# Altium PCB СТЖ-1-ПП-02-00-001-1.PcbDoc
Units mm, origin at the board's own origin, x right, y up, seen from the top; angles counter-clockwise.
Board outline 70 x 80 mm, 2 copper layers (Top Layer, Bottom Layer), stack 2.036 mm thick; 33 components, 37 nets, 153 pads, 63 vias.
Unrouted connection lines stored in the file: 10.
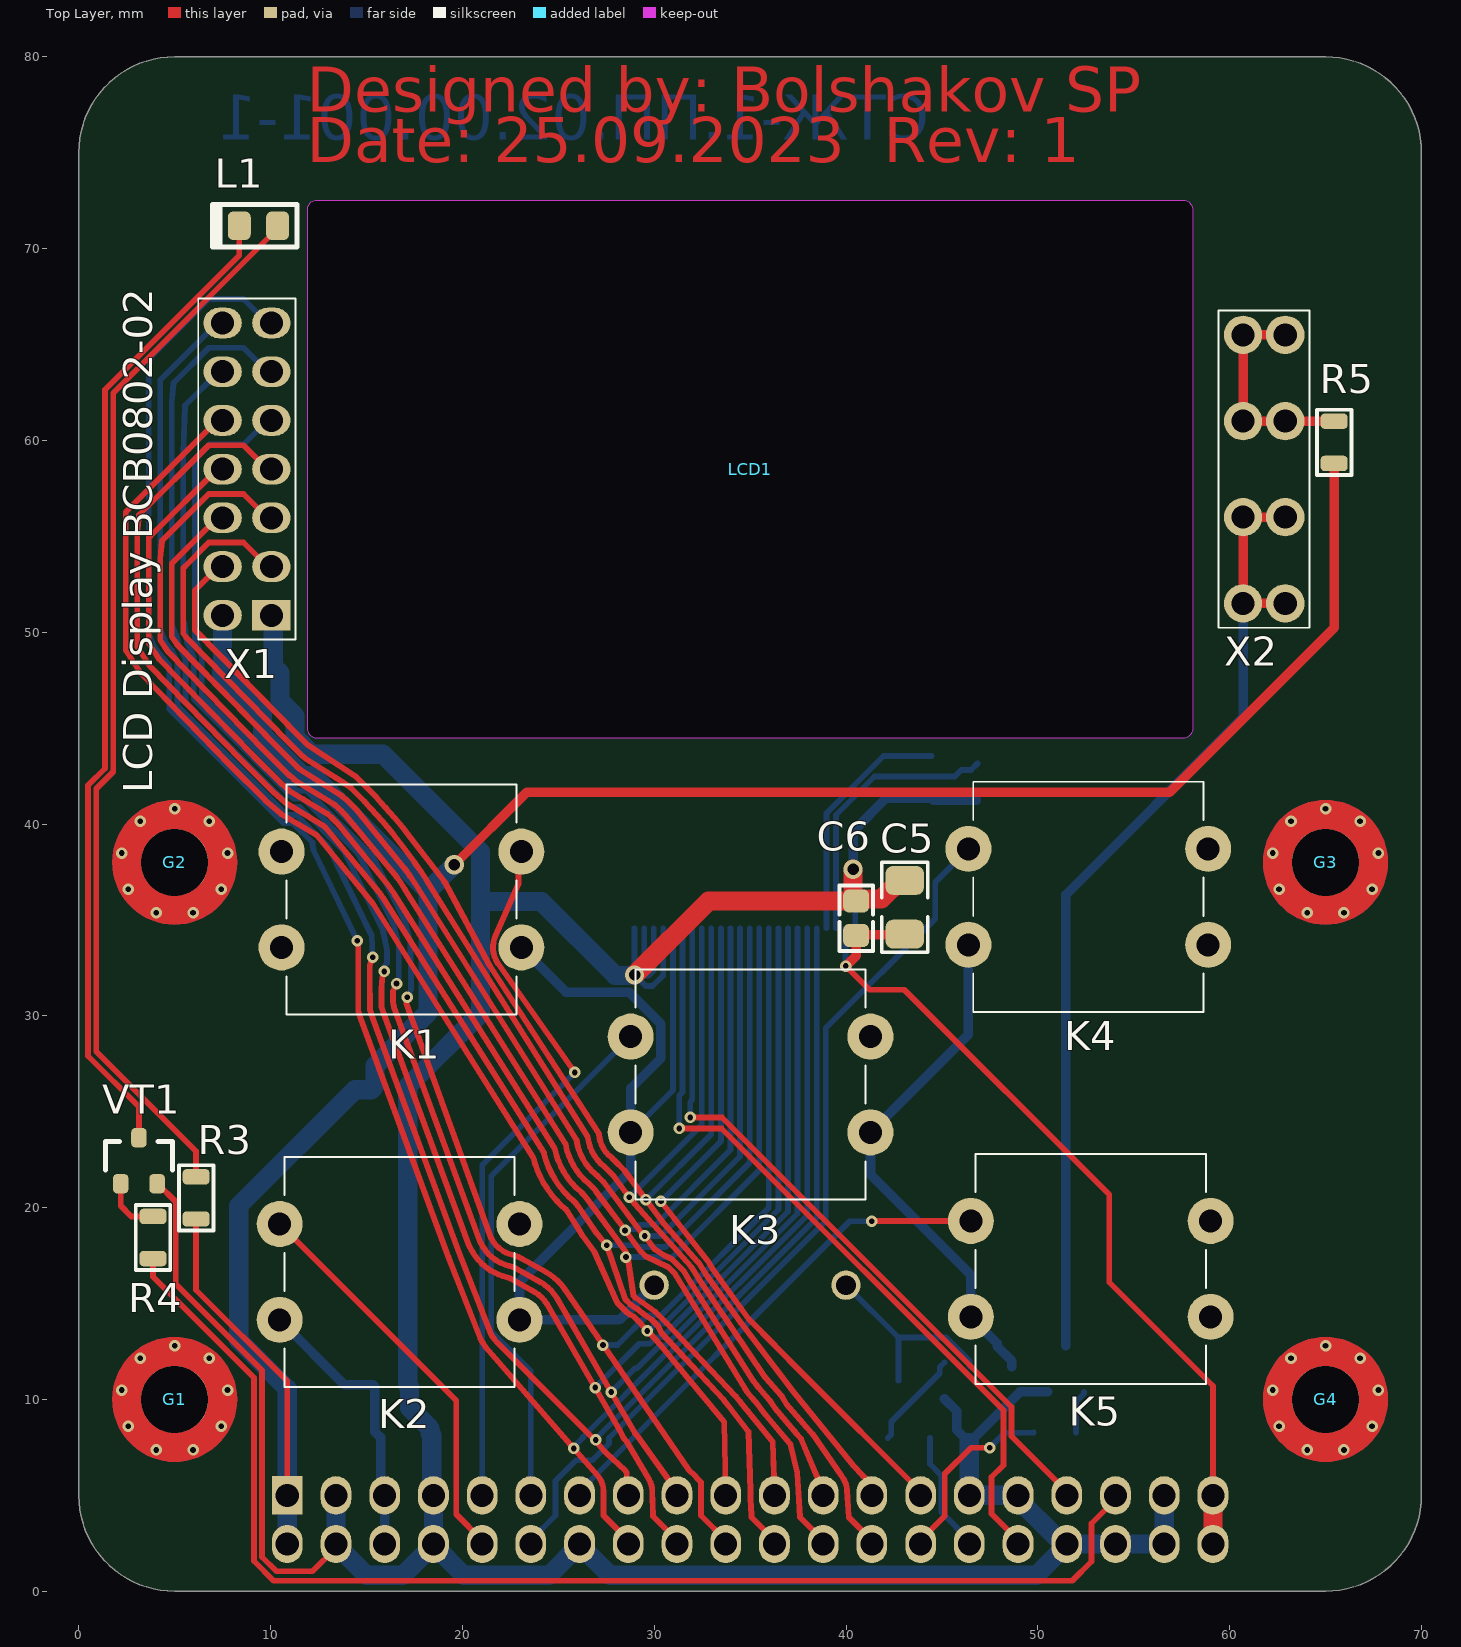
[diagram p0: Top Layer view]
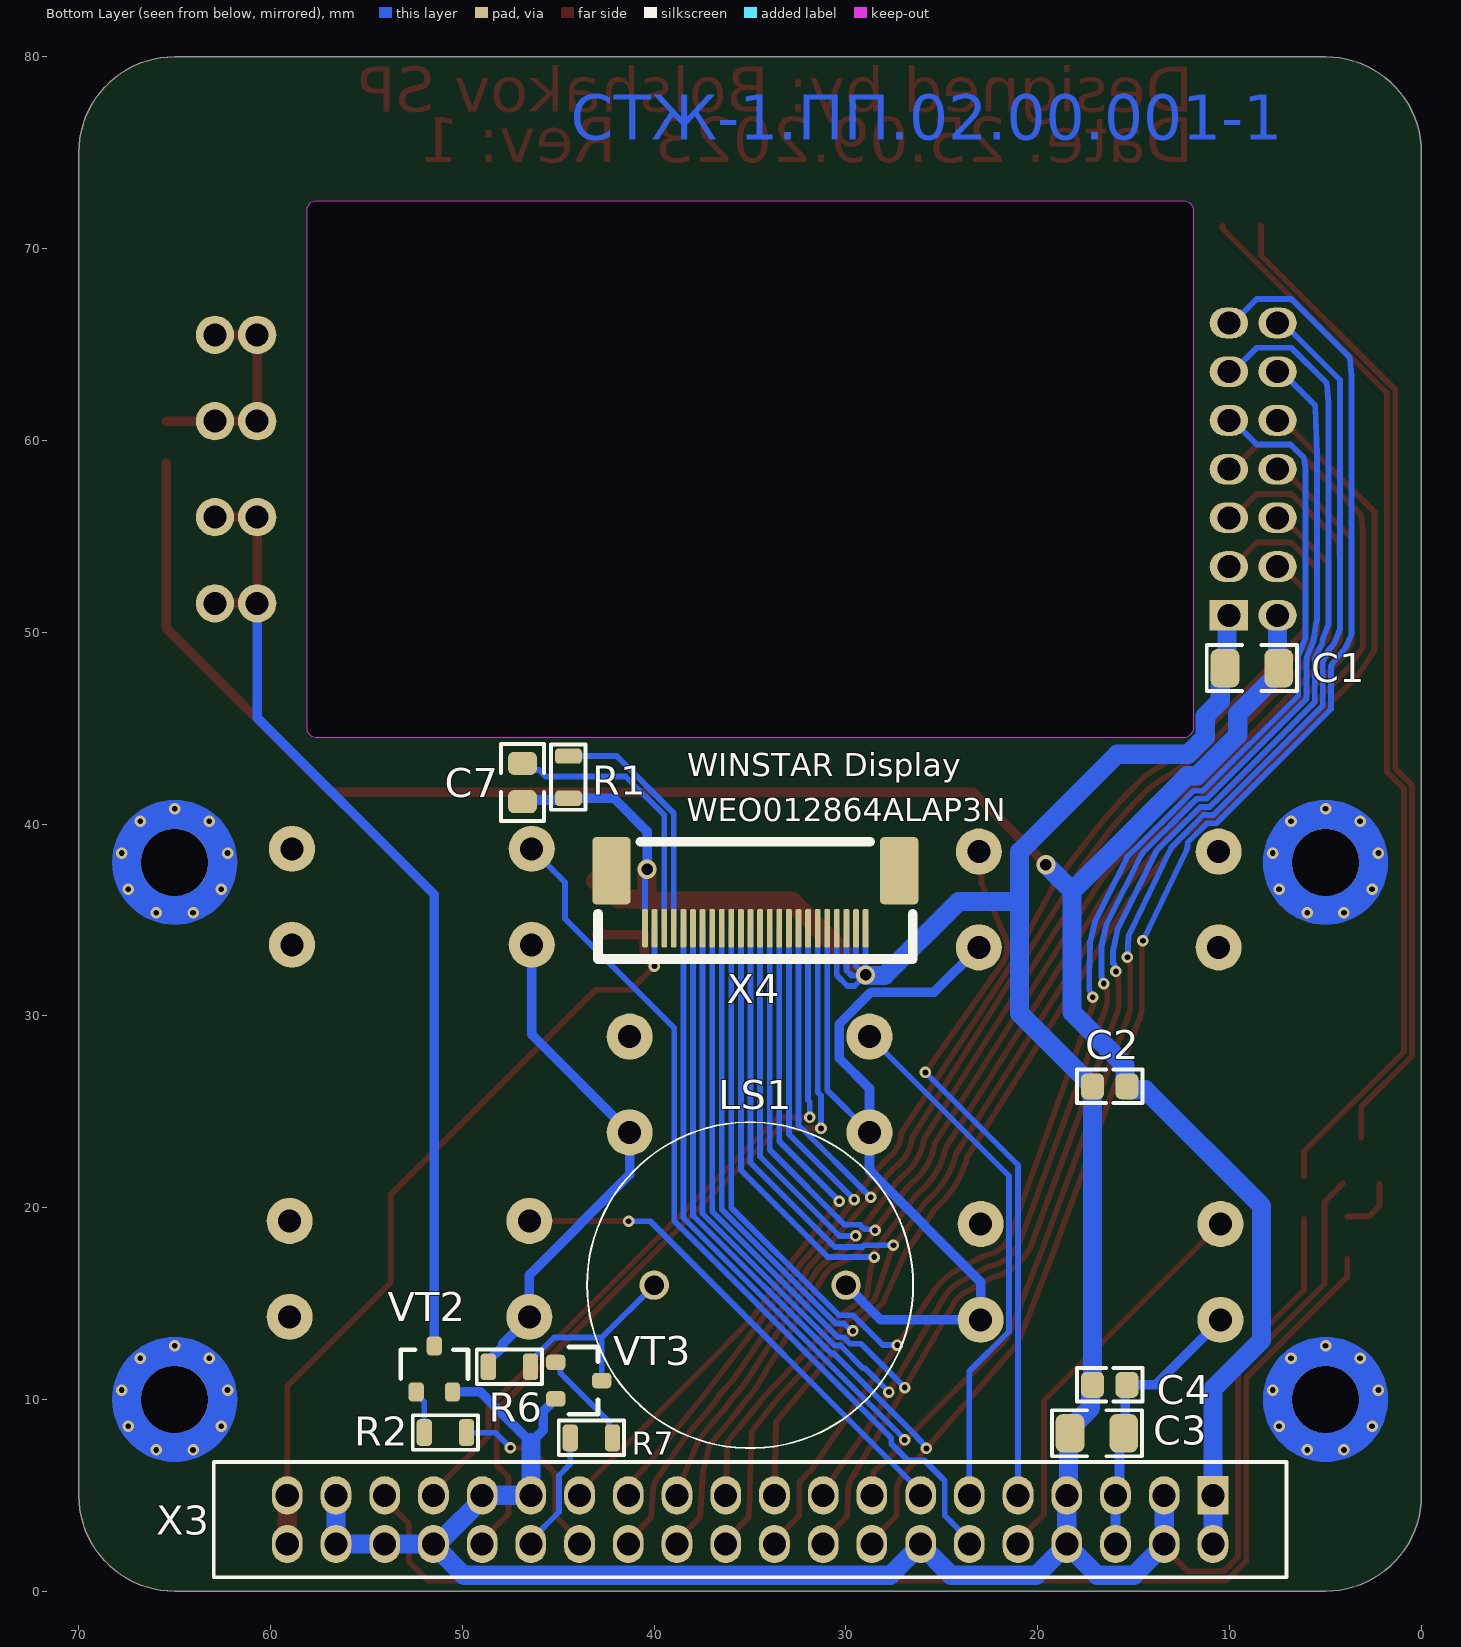
[diagram p1: Bottom Layer view, seen from below]
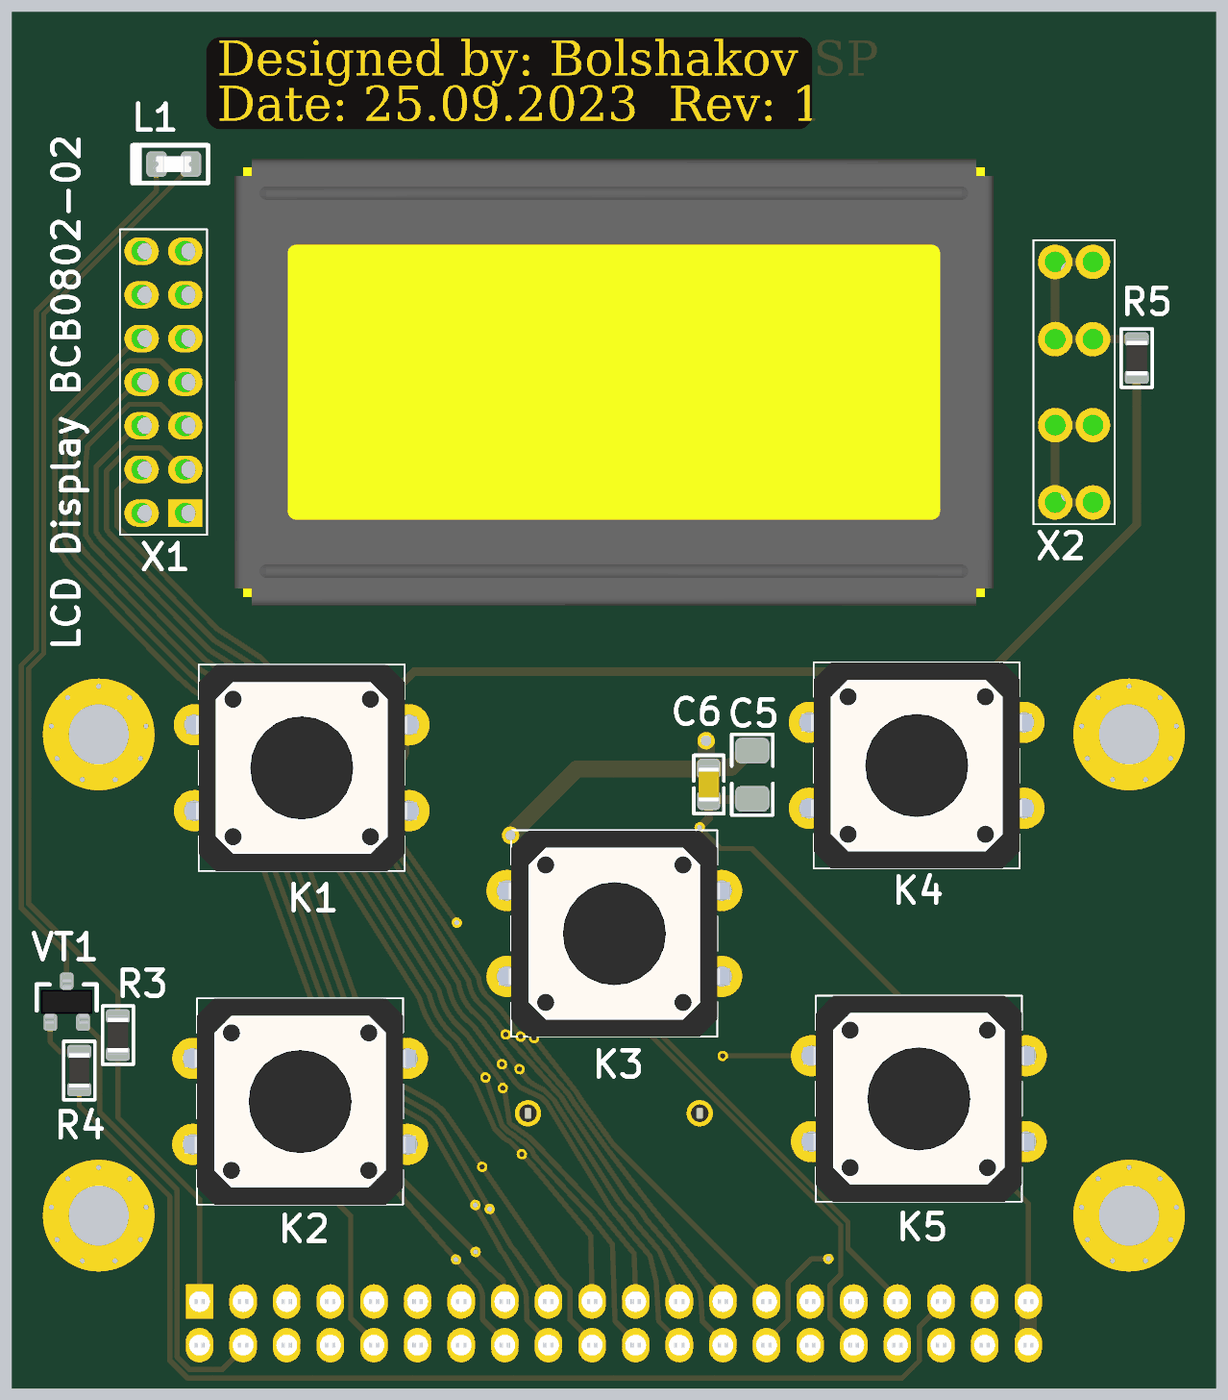
[diagram p2: 3D render of the assembled board from above, using the file's embedded part models]
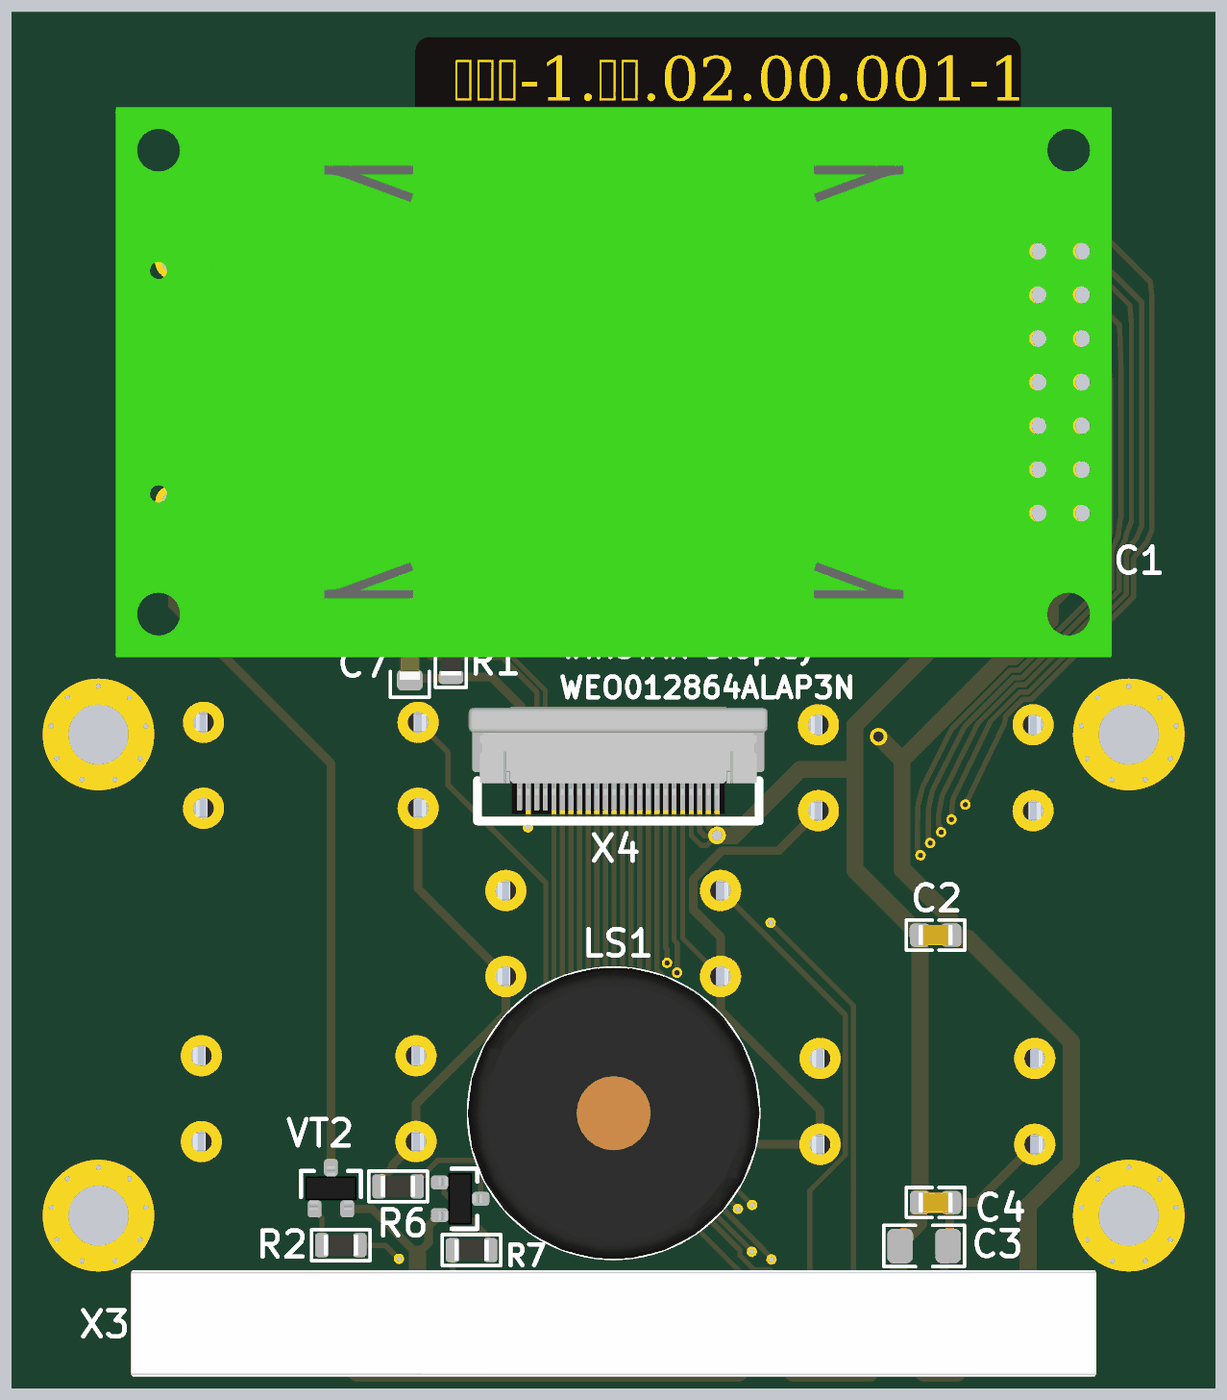
[diagram p3: 3D render of the assembled board from below, using the file's embedded part models]

## Layer stack, top to bottom
Top Solder: solder mask 0.01, Solder Resist, Dk 3.5
Top Layer: signal copper 0.018
Dielectric1: dielectric 2, FR-4, Dk 4.8
Bottom Layer: signal copper 0.018
Bottom Solder: solder mask 0.01, Solder Resist, Dk 3.5

## Board outline
0,5 0,75 cw(c5,75) 5,80 65,80 cw(c65,75) 70,75 70,5 cw(c65,5) 65,0 5,0 cw(c5,5)
cut-out: 11.9,45 ccw(c12.4,45) 12.4,44.5 57.6,44.5 ccw(c57.6,45) 58.1,45 58.1,72 ccw(c57.6,72) 57.6,72.5 12.4,72.5 ccw(c12.4,72) 11.9,72

## Design rules (kind name [scope] priority, off if disabled: settings)
Clearance [All] p1: gap=0.125 ignorepadtopadclearanceinfootprint=FALSE
HoleSize [All] p1: absolutevalues=TRUE maxlimit=5 minlimit=0.3 maxpercent=80.000 minpercent=20.000
HoleToHoleClearance [All] p1: gap=0.3 allowstackedmicrovias=TRUE
MinimumSolderMaskSliver [All] p1: minsoldermaskwidth=0.125
PlaneClearance [All] p1: clearance=0.2
PlaneConnect [All] p1: planeconnectstyle=Relief reliefexpansion=0.6 reliefentries=4 reliefconductorwidth=0.5 reliefairgap=0.2
PolygonConnect [All] p1: connectstyle=Relief reliefconductorwidth=0.3 reliefentries=4 polygonreliefangle="90 Angle" airgapwidth=0.2
RoutingVias [All] p1: holewidth=0.3 width=0.6 viastyle="Through Hole" minholewidth=0.3 minwidth=0.3 maxholewidth=5 maxwidth=10
SilkToSilkClearance [All] p1: silktosilkclearance=0
SilkToSolderMaskClearance [IsPad] p1: minsilkscreentomaskgap=0 clearancetoexposedcopper=TRUE
SolderMaskExpansion [All] p1: expansion=0.01 istentingtop=FALSE
Width [All] p1: maxlimit=1 minlimit=0.3 preferedwidth=0.5
23 further rules are at their usual default settings.

## Components (designator, comment, footprint, x,y, rotation, side; value= is the part's Value field where it differs from the comment)
C1 "4.7мкФ 50В" C-1206 8.841,48.126 r0 bottom value="Керамический конденсатор X7R 4.7мкФ ±10% 50В, 1206"
C2 "100нФ 50В" C-0805 16.25,26.322 r180 bottom value="Керам. ЧИП конд. 0,1 мкФ - 50 В - X7R - 10 % - 0805"
C3 "4.7мкФ 50В" C-1206 16.919,8.234 r180 bottom value="Керамический конденсатор X7R 4.7мкФ ±10% 50В, 1206"
C4 "100нФ 50В" C-0805 16.25,10.759 r180 bottom value="Керам. ЧИП конд. 0,1 мкФ - 50 В - X7R - 10 % - 0805"
C5 "4.7мкФ 50В" C-1206 43.062,35.659 r270 top value="Керамический конденсатор X7R 4.7мкФ ±10% 50В, 1206"
C6 "100нФ 50В" C-0805 40.527,35.087 r270 top value="Керам. ЧИП конд. 0,1 мкФ - 50 В - X7R - 10 % - 0805"
C7 "25В 2.2мкФ" C-0805-1.25h 46.869,42.162 r90 bottom value="Керам. ЧИП конд. 2,2 мкФ - 25 В - X7R - 10 % - 0805"
G1 "Винт М3" "Standoff M3 - without 3D" 5,10 r0 top
G2 "Винт М3" "Standoff M3 - without 3D" 5,38 r0 top
G3 "Винт М3" "Standoff M3 - without 3D" 65,38 r0 top
G4 "Винт М3" "Standoff M3 - without 3D" 65,10 r0 top
K1 "KAN1211-0501B" "Tactile switch 12X12X5mm smd" 16.822,36.064 r0 top locked
K2 "KAN1211-0501B" "Tactile switch 12X12X5mm smd" 16.727,16.646 r0 top locked
K3 "KAN1211-0501B" "Tactile switch 12X12X5mm smd" 35.026,26.418 r0 top locked
K4 "KAN1211-0501B" "Tactile switch 12X12X5mm smd" 52.634,36.204 r0 top locked
K5 "KAN1211-0501B" "Tactile switch 12X12X5mm smd" 52.758,16.804 r0 top locked
L1 "RED" LED_0805_KB 9.368,71.19 r180 top value="Керам. ЧИП конд. 2,2 мкФ - 25 В - X7R - 10 % - 0805"
LCD1 "Дисплей" BCB0802-02-BL 35,58.5 r0 top locked
LS1 "PS1740P02E" PS1740P02E 29.999,15.956 r0 bottom locked
R1 "910 кОм" R-0805 44.473,42.441 r90 bottom value="Чип резистор 360 кОм - 0,125 Вт - 5% - 0805"
R2 "1,2 кОм" R-0805 50.887,8.278 r0 bottom value="Чип резистор 1,2 кОм - 0,125 Вт - 5 % - 0805"
R3 "120 Ом" R-0805 6.118,20.507 r90 top value="Чип резистор 120 Ом - 0,125 Вт - 5% - 0805"
R4 "1,2 кОм" R-0805 3.868,18.442 r270 top value="Чип резистор 1,2 кОм - 0,125 Вт - 5 % - 0805"
R5 "0 Ом" R-0805 65.448,59.9 r270 top value="Чип резистор 0 Ом - 0,125 Вт - 5% - 0805"
R6 "1 кОм" R-0805 47.55,11.701 r0 bottom value="Чип резистор 1 кОм - 0,125 Вт - 5 % - 0805"
R7 "1,2 кОм" R-0805 43.274,7.995 r180 bottom value="Чип резистор 1,2 кОм - 0,125 Вт - 5 % - 0805"
VT1 "IRLML2502" SOT-23 3.135,22.445 r0 top value="DMG1012T-7, MOSFET N-Channel 20V 0.63, SOT-523"
VT2 "IRLML2502" SOT-23 51.464,11.592 r180 bottom value="DMG1012T-7, MOSFET N-Channel 20V 0.63, SOT-523"
VT3 "IRLML2502" SOT-23 43.933,10.98 r270 bottom value="DMG1012T-7, MOSFET N-Channel 20V 0.63, SOT-523"
X1 "KLS1-207-2-14-S" PLS-2x14 10.04,50.88 r180 top locked value="Вилка на плату PLS-4, шаг 2.54 мм"
X2 "KLS1-207-2-14-S" "PLS-2x8 for BCB0802-02-BL" 60.7,65.5 r0 top value="Вилка на плату PLS-4, шаг 2.54 мм"
X3 "DS1018-40" FDC-40 10.87,5 r270 bottom locked value="Вилка на плату PLS-4, шаг 2.54 мм"
X4 "0510-24RLGF" "FPC 24pin" 34.728,38.564 r0 bottom locked value="Вилка на плату PLS-4, шаг 2.54 мм"

## Footprints (in the part's own frame and the unit in brackets; to place one, negate y for a bottom-side part, rotate by r counter-clockwise, add the part's x,y. Pads: shape width x height; smd on the part's side, far side on the other; paste and mask are expansions set on the pad)
BCB0802-02-BL [mm]
  body extent -29,-16 29,16, height 4.1
C-0805 [mm] "Chip Capacitor, 2-Leads, Body 2,00x1,20mm, IPC Medium Density"
  rrect50% 1.2x1.35 smd: 1(-0.9,0) 2(0.9,0)
  silkscreen extent -1.7,-0.87 1.7,0.87, body extent -1,-0.6 1,0.6, height 1.25
C-0805-1.25h [mm] "Capacitor 0805 case, 1.25 mm height"
  rrect50% 1.2x1.5 smd: 1(-1,0) 2(1,0)
  silkscreen extent -2,-1.13 2,1.12, body extent -1,-0.6 1,0.6, height 1.2
C-1206 [mm] "Chip Capacitor, 2-Leads, Body 3,20x1,60mm, IPC Medium Density"
  rrect50% 1.5x2 smd: 1(-1.4,0) 2(1.4,0)
  silkscreen extent -2.35,-1.2 2.35,1.2, body extent -1.7,-0.9 1.7,0.9, height 1.15
FDC-40 [mm]
  rect 2x1.6 hole 1.2: 1(0,0)
  oval 2x1.6 hole 1.2: 2(2.54,0) 3(0,-2.54) 4(2.54,-2.54) 5(0,-5.08) 6(2.54,-5.08) 7(0,-7.62) 8(2.54,-7.62) 9(0,-10.16) 10(2.54,-10.16) 11(0,-12.7) 12(2.54,-12.7) 13(0,-15.24) 14(2.54,-15.24) 15(0,-17.78) 16(2.54,-17.78) 17(0,-20.32) 18(2.54,-20.32) 19(0,-22.86) 20(2.54,-22.86) 21(0,-25.4) 22(2.54,-25.4) 23(0,-27.94) 24(2.54,-27.94) 25(0,-30.48) 26(2.54,-30.48) 27(0,-33.02) 28(2.54,-33.02) 29(0,-35.56) 30(2.54,-35.56) 31(0,-38.1) 32(2.54,-38.1) 33(0,-40.64) 34(2.54,-40.64) 35(0,-43.18) 36(2.54,-43.18) 37(0,-45.72) 38(2.54,-45.72) 39(0,-48.26) 40(2.54,-48.26)
  silkscreen extent -1.73,-52.09 4.27,3.83, body extent -1.73,-52.23 4.27,3.97, height 15
"FPC 24pin" [mm]
  rrect50% 0.3x2 smd: 1(-5.75,4) 2(-5.25,4) 3(-4.75,4) 4(-4.25,4) 5(-3.75,4) 6(-3.25,4) 7(-2.75,4) 8(-2.25,4) 9(-1.75,4) 10(-1.25,4) 11(-0.75,4) 12(-0.25,4) 13(0.25,4) 14(0.75,4) 15(1.25,4) 16(1.75,4) 17(2.25,4) 18(2.75,4) 19(3.25,4) 20(3.75,4) 21(4.25,4) 22(4.75,4) 23(5.25,4) 24(5.75,4)
  rrect20% 2x3.5 smd: M(-7.5,1) M(7.5,1)
  silkscreen extent -8.2,-0.5 8.2,5.6, body extent -8.71,-1.01 8.71,4.1, height 2.1
LED_0805_KB [mm]
  rrect50% 1.2x1.5 smd: 1(-1,0) 2(1,0)
  silkscreen extent -2,-1.1 2.4,1.1, body extent -1.03,-0.45 1.03,0.46, height 0.85
"PLS-2x8 for BCB0802-02-BL" [mm]
  round 2 hole 1.2: 1(0,0) 2(2.2,0) 3(0,-4.5) 4(2.2,-4.5) 5(0,-9.5) 6(2.2,-9.5) 7(0,-14) 8(2.2,-14)
  silkscreen extent -1.27,-15.27 3.47,1.27
PLS-2x14 [mm]
  rect 2x1.6 hole 1.2: 1(0,0)
  oval 2x1.6 hole 1.2: 2(2.54,0) 3(0,-2.54) 4(2.54,-2.54) 5(0,-5.08) 6(2.54,-5.08) 7(0,-7.62) 8(2.54,-7.62) 9(0,-10.16) 10(2.54,-10.16) 11(0,-12.7) 12(2.54,-12.7) 13(0,-15.24) 14(2.54,-15.24)
  silkscreen extent -1.27,-16.51 3.81,1.27
PS1740P02E [mm]
  round 1.53 hole 1.02: 1(0,0) 2(10,0)
  silkscreen extent -3.5,-8.5 13.5,8.5, body extent -3.5,-8.49 13.5,8.49, height 7.5
R-0805 [mm] "Chip Resistor 125mW"
  rrect50% 0.8x1.4 smd: 1(-1.1,0) 2(1.1,0)
  silkscreen extent -1.7,-0.9 1.7,0.9, body extent -1,-0.6 1,0.6, height 0.45
SOT-23 [mm]
  rrect50% 0.8x1 smd: 1(-0.95,-1.2) 2(0.95,-1.2) 3(0,1.2)
  silkscreen extent -1.75,-0.5 1.75,1, body extent -1.5,-1.27 1.5,1.27, height 1.1
"Standoff M3 - without 3D" [mm]
  round 3.5 hole 3.5 mask+1.5: G(0,0)
  Top Layer region: 0,3.25 1.244,3.003 2.298,2.298 3.003,1.244 3.25,0 3.25,0 3.003,-1.244 2.298,-2.298 1.244,-3.003 0,-3.25 0,-3.25 -1.244,-3.003 -2.298,-2.298 -3.003,-1.244 -3.25,0 -3.25,0 -3.003,1.244 -2.298,2.298 -1.244,3.003 0,3.25
  Bottom Layer region: 0,3.25 1.244,3.003 2.298,2.298 3.003,1.244 3.25,0 3.25,0 3.003,-1.244 2.298,-2.298 1.244,-3.003 0,-3.25 0,-3.25 -1.244,-3.003 -2.298,-2.298 -3.003,-1.244 -3.25,0 -3.25,0 -3.003,1.244 -2.298,2.298 -1.244,3.003 0,3.25
"Tactile switch 12X12X5mm smd" [mm]
  round 2.4 hole 1.2: 1(-6.25,2.5) 1(6.25,2.5) 2(-6.25,-2.5) 2(6.25,-2.5)
  silkscreen extent -6,-6 6,6, body extent -6.72,-6.01 6.73,5.99, height 4

## Part data
C1 C3 C5: library part CC1206KKX7R9BB475, "Конденсатор 1206 10% 50В 4.7мкФ X7R", Note=Yageo
C2 C4 C6: library part GRM21BR71H104KA01L, "Конденсатор 0805 10% 50В 100нФ X7R"
C7: library part GRM21BR71E225KA73L, "Конденсатор 0805 10% 25В 2.2мкФ X7R", Note="MURATA corp."
G1 G2 G3 G4: "Винт М3 DIN 967"
K1 K2 K3 K4 K5: "Кнопка тактовая 12x12x5"
L1: library part KP-2012SURCK, "Светодиод 0805 RED 2,5В 230мКд", Note="MURATA corp."
LS1: "Loudspeaker or Buzzer", Manufacturer_Name=TDK, Mouser Part Number=810-PS1740P02E, Arrow Part Number=PS1740P02E, Arrow Price/Stock=https://www.arrow.com/en/products/ps1740p02e/tdk?region=nac, Datasheet Link=https://product.tdk.com/system/files/dam/doc/product/sw_piezo/sw_piezo/piezo-buzzer/catalog/piezoelectronic_buzzer_ps_en.pdf, Height=7.8mm, Manufacturer_Part_Number=PS1740P02E, Mouser Price/Stock=https://www.mouser.co.uk/ProductDetail/TDK/PS1740P02E?qs=80T3JVN997CRFROxd67bkQ%3D%3D
R1: library part RC0805JR-07910KL, "Резистор 0805 5% 910 кОм", Note=YAGEO
R2 R4 R7: library part RC0805JR-071K2L, "Резистор 0805 5% 1,2 кОм", Note=YAGEO
R3: library part RC0805JR-07120RL, "Резистор 0805 5% 120 Ом", Note=YAGEO
R5: library part RC0805JR-070RL, "Резистор 0805 5% 0 Ом", Note=YAGEO
R6: library part RC0805JR-071KL, "Резистор 0805 5% 1 кОм"
VT1 VT2 VT3: "Транзистор MOSFET N-Channel 20В 4.2А"
X1 X2: "Разъем PLS-14, шаг 2.54 мм"
X3: library part "FDC-40 (DS1018-40)", "Разъем шлейф, шаг 2.54 мм"
X4: "Разъем FPC Flip-Lock 24p 0,5мм"

## Via types
v1: diameter 0.6, hole 0.3, Top Layer to Bottom Layer, 60 vias
v2: diameter 1, hole 0.6, Top Layer to Bottom Layer, 3 vias

## Nets (pads, with @x,y where several pads share a name; then routed paths per layer and width w, separated by ;. In a path a pad name is that pad's centre, name@x,y a point inside that pad or via, vN(x,y) a via of type N, cw(c..) or ccw(c..) an arc to the next point about the centre after c; other vN are vias at no path point)
+3V3: C3.2 C4.2 K1.2 K2.2 K3.2 K4.2 K5.2 LS1.1 R6.2 X3.5 X3.6 X4.5 | length 88.7
  Bottom Layer w0.3: K3.2@28.776,23.918 30.978,26.12 X4.5
  Bottom Layer w0.5: K2.2@10.477,14.146 13.864,10.759 C4.2 15.435,10.675 15.435,8.318 C3.2 15.74,8.013 15.74,5.21 X3.5 X3.6 ; K1.2@23.072,33.564 25.404,31.232 28.69,31.232 30.351,29.571 30.351,27.789 28.776,26.214 28.776,23.918 28.776,21.932 22.977,16.133 22.977,14.146 28.189,14.146 LS1.1 ; K4.2@46.384,33.704 46.384,29.026 41.276,23.918 41.276,21.727 46.508,16.495 46.508,14.304 47.887,12.925 47.887,12.763 48.65,12.001 R6.2
+5V: C1.1 C2.2 R3.1 R5.2 X1.2 X3.1 X3.2 | length 136.7
  Top Layer w0.3: R3.1 6.118,15.707 10.87,10.955 X3.1
  Top Layer w0.5: v2(19.578,37.874) 23.367,41.663 56.887,41.663 65.448,50.224 R5.2
  Bottom Layer w1: X1.2 7.5,48.626 C1.1 7.441,47.876 9.58,45.738 9.58,44.638 11.704,42.514 12.208,42.514 18.21,36.512 ; X3.2 X3.1 10.87,10.557 8.341,13.086 8.341,20.092 14.397,26.147 15.25,26.147 15.35,26.247 C2.2 15.45,26.422 15.45,27.408 18.21,30.167 18.21,36.512 ; v2(19.578,37.874) 19.572,37.874 18.21,36.512
+12V: C5.2 C6.2 X3.39 X3.40 X4.23 | length 45.5
  Top Layer w0.3: v1(39.99,32.592) 41.226,31.356 43.041,31.356 53.73,20.668 53.73,16.103 59.13,10.704 X3.39 ; C6.2 C6.2@40.564,34.223 ; C5.2@43.026,34.223 C5.2
  Top Layer w0.5: v1(39.99,32.592) 40.527,33.129 C6.2 ; C6.2@40.564,34.223 C5.2@43.026,34.223
  Top Layer w1: X3.40 X3.39
  Bottom Layer w0.3: X4.23 39.978,32.604 v1(39.99,32.592)
Display_BackLight: R2.1 X3.28 | length 9.7
  Top Layer w0.3: X3.28 43.89,2.66 45.152,3.922 45.152,6.126 46.512,7.486 v1(47.496,7.486)
  Bottom Layer w0.3: v1(47.496,7.486) 48.27,8.26 49.768,8.26 R2.1
Display_BS1: X3.32 X4.6 | length 41.3
  Top Layer w0.3: v1(31.303,24.13) 33.516,24.13 48.21,9.436 48.21,6.571 47.591,5.952 47.591,4.039 48.97,2.66 X3.32
  Bottom Layer w0.3: v1(31.303,24.13) 31.303,25.844 31.478,26.019 X4.6
Display_BS2: X3.33 X4.7 | length 38.7
  Top Layer w0.3: v1(31.884,24.705) 33.542,24.705 48.635,9.612 48.635,8.075 51.51,5.2 X3.33
  Bottom Layer w0.3: v1(31.884,24.705) 31.884,25.511 31.978,25.605 X4.7
Display_DB0: X1.7 X3.22 X4.13 | length 96.2
  Top Layer w0.3: X1.7 9.84,58.5 8.59,59.75 6.782,59.75 3.138,56.106 3.05,55.175 3.05,49.23 3.711,48.227 8.525,43.289 8.526,43.288 10.132,41.682 10.764,41.126 12.777,39.895 12.846,39.827 12.848,39.825 12.87,39.804 15.762,36.296 15.845,36.173 15.858,36.152 cw(c15.352,35.83) 15.859,36.15 24.249,22.856 ccw(c28.776,23.918) 25.794,20.35 25.884,20.261 25.898,20.246 26.021,20.085 26.945,18.732 27.448,18.117 v1(27.526,18.04) 28.496,15.221 28.77,14.948 28.906,14.845 29.073,14.745 29.2,14.656 29.413,14.476 29.877,14.149 30.214,13.812 30.363,13.478 33.616,9.991 33.883,9.644 34.855,8.392 34.914,8.316 35.02,5.239 35.02,5.234 ; 35.02,5.234 35.02,5.231 ccw(c36.27,5.2) 35.02,5.2 35.02,4.8 ccw(c36.27,4.8) 35.038,4.586 35.045,4.521 35.068,3.862 35.151,3.779 36.27,2.66 X3.22
  Bottom Layer w0.3: v1(27.526,18.04) 29.059,18.04 29.148,17.95 30.584,17.95 34.978,22.345 X4.13
Display_DB1: X1.8 X3.21 X4.14 | length 88.7
  Top Layer w0.3: X1.8 7.224,58.5 3.738,55.014 3.65,54.926 3.65,49.41 4.178,48.608 9.125,43.538 9.126,43.536 10.542,42.12 10.991,41.726 13.004,40.495 cw(c10.302,37.272) 13.267,40.255 13.27,40.251 13.285,40.237 cw(c-4.122,22.848) 13.47,40.05 16.138,36.809 16.317,36.549 16.445,36.356 24.812,23.088 ccw(c28.776,23.918) 26.199,20.794 26.218,20.775 26.383,20.61 26.495,20.463 28.087,18.296 28.53,17.673 v1(28.53,17.424) 28.565,17.389 28.635,17.319 28.917,15.402 29.006,15.313 29.027,15.298 30.053,14.574 30.071,14.556 30.639,13.988 34.26,10.154 34.467,9.905 34.485,9.868 36.115,7.87 36.178,7.791 36.27,5.2 36.27,5.195 X3.21
  Bottom Layer w0.3: v1(28.53,17.424) 30.954,17.424 35.478,21.948 X4.14
Display_DB2: X1.9 X3.20 X4.15 | length 97.8
  Top Layer w0.3: v1(17.131,30.965) 17.081,30.842 17.081,30.66 21.424,18.588 ccw(c22.977,19.146) 22.102,17.747 ccw(c22.977,19.146) 22.599,17.54 cw(c22.157,15.692) 23.085,17.35 24.365,16.636 cw(c22.977,14.146) 25.153,15.987 cw(c22.977,14.146) 25.326,15.76 27.332,12.841 31.82,6.309 ccw(c32.068,6.478) 31.897,6.231 ; X3.20 33.73,2.66 32.44,3.95 32.44,5.681 32.235,5.886 ccw(c31.19,5.2) 31.898,6.23 ; 31.897,6.231 31.898,6.23
  Bottom Layer w0.3: X1.9 9.84,61.04 8.59,59.79 6.822,59.79 6.138,59.106 6.069,58.718 ccw(c7.3,58.5) 6.05,58.5 6.05,49.694 6.416,48.758 6.416,46.706 11.383,41.739 11.887,41.739 15.297,38.329 cw(c15.085,38.117) 15.353,38.251 16.957,35.038 17.017,34.899 17.276,33.86 17.317,31.991 17.317,31.37 17.242,31.158 17.131,31.047 v1(17.131,30.965) ; v1(27.327,12.837) 28.088,12.837 29.641,14.389 30.369,14.389 30.978,14.998 35.978,19.998 X4.15
Display_DB3: X1.10 X3.19 X4.16 | length 93.6
  Top Layer w0.3: X1.10 7.224,61.04 2.538,56.354 2.45,56.266 2.45,49.05 3.243,47.846 7.925,43.041 7.926,43.039 9.721,41.244 10.354,40.688 10.538,40.526 12.434,39.389 15.354,35.827 23.69,22.618 ccw(c28.776,23.918) 25.388,19.908 25.396,19.9 ; 25.397,19.899 25.421,19.875 26.239,18.578 26.248,18.566 26.872,17.711 28.071,15.045 28.594,14.523 28.729,14.427 28.935,14.32 29.024,14.231 29.639,13.601 v1(29.639,13.574) 29.814,13.398 30.256,12.918 33.655,8.821 33.73,5.2 X3.19
  Bottom Layer w0.3: v1(29.639,13.574) 29.72,13.574 30.098,13.952 30.533,13.952 36.478,19.897 X4.16
Display_DB4: X1.11 X3.18 X4.17 | length 104.9
  Top Layer w0.3: v1(15.926,32.313) 15.817,31.991 15.781,31.413 15.781,30.46 15.808,30.387 15.811,30.38 15.869,30.181 20.305,18.117 20.387,17.928 20.472,17.783 20.522,17.699 ccw(c22.977,19.146) 21.029,17.066 ccw(c22.977,19.146) 21.323,16.825 21.372,16.79 ccw(c21.894,17.524) 21.417,16.76 21.471,16.727 ccw(c22.977,19.146) 22.318,16.374 cw(c22.157,15.692) 22.498,16.304 23.78,15.588 cw(c22.977,14.146) 24.406,14.971 26.922,10.613 28.167,8.456 ; 28.168,8.455 cw(c27.907,8.306) 28.17,8.451 28.188,8.417 cw(c27.925,8.273) 28.193,8.409 ; 28.193,8.408 28.393,8.008 ccw(c28.662,8.142) 28.445,7.934 ; 28.446,7.933 28.56,7.816 29.726,5.836 cw(c28.65,5.2) 29.736,5.819 cw(c28.65,5.2) 29.899,5.238 29.94,3.91 30.028,3.822 31.19,2.66 X3.18
  Bottom Layer w0.3: X1.11 9.84,63.58 8.59,64.83 6.782,64.83 4.938,62.986 4.85,61.979 4.85,50.383 5.133,49.675 5.2,49.342 5.282,49.194 5.541,48.662 5.566,48.597 5.566,46.354 11.031,40.889 11.535,40.889 13.765,38.658 13.823,38.577 15.864,34.443 16.076,33.363 16.076,32.741 15.984,32.649 15.984,32.37 v1(15.926,32.313) ; v1(26.932,10.618) 29.22,12.907 29.784,12.907 30.117,13.239 30.421,13.239 36.978,19.796 X4.17
Display_DB5: X1.12 X3.17 X4.18 | length 97.2
  Top Layer w0.3: v1(16.567,31.68) 16.381,31.276 16.381,30.767 16.43,30.469 20.905,18.258 20.965,18.138 ccw(c22.977,19.146) 21.671,17.314 21.72,17.279 ccw(c21.894,17.524) 21.735,17.269 21.785,17.238 ccw(c22.977,19.146) 22.458,16.957 cw(c22.157,15.692) 22.791,16.827 24.074,16.111 cw(c22.977,14.146) 24.924,15.274 ; 24.925,15.273 27.756,10.384 28.996,8.243 ; 28.996,8.243 ccw(c29.256,8.392) 29.039,8.185 29.045,8.179 29.16,8.058 31.19,5.2 X3.17
  Bottom Layer w0.3: X1.12 7.3,63.58 5.538,61.818 5.45,59.266 5.45,50.631 5.515,50.393 5.625,49.518 5.904,48.899 5.991,48.678 5.991,46.53 11.207,41.314 11.711,41.314 14.513,38.512 14.597,38.395 16.418,34.757 16.455,34.642 16.676,33.611 16.676,32.002 16.624,31.833 16.624,31.738 v1(16.567,31.68) ; v1(27.759,10.386) 29.002,11.629 29.107,11.629 30.293,12.814 30.597,12.814 37.478,19.695 X4.18
Display_DB6: X1.13 X3.16 X4.19 | length 110.5
  Top Layer w0.3: v1(14.518,33.917) 14.576,33.858 14.576,30.257 14.703,29.84 19.187,17.652 19.27,17.434 20.944,13.159 21.029,13.012 ccw(c22.974,14.148) 21.072,12.942 21.205,12.733 25.81,7.447 27.052,6.021 ; 27.053,6.021 cw(c26.11,5.2) 27.36,5.199 27.36,3.95 27.448,3.862 28.65,2.66 X3.16
  Bottom Layer w0.3: X1.13 9.84,66.12 8.59,67.37 6.782,67.37 3.738,64.326 3.65,63.395 3.65,49.886 3.95,49.203 4.414,48.637 4.639,48.364 4.648,48.353 cw(c4.416,48.162) 4.716,48.162 4.716,46.002 10.679,40.039 11.183,40.039 12.189,39.033 12.189,38.922 ccw(c12.489,38.922) 12.195,38.863 12.242,38.631 v1(14.518,33.917) ; v1(25.807,7.445) 25.807,7.526 26.289,8.008 26.289,8.045 30.633,12.389 30.773,12.389 37.978,19.594 X4.19
Display_DB7: X1.14 X3.15 X4.20 | length 102.5
  Top Layer w0.3: v1(15.326,33.052) 15.176,32.624 15.176,32.003 15.181,30.382 15.181,30.368 15.185,30.318 15.234,30.158 15.337,29.865 19.787,17.765 21.457,13.495 ccw(c22.974,14.148) 21.805,12.981 ; 21.805,12.981 26.896,7.89 v1(26.947,7.89) 26.947,7.809 27.009,7.747 27.093,7.663 27.427,7.281 27.519,7.189 28.476,6.31 cw(c28.273,6.089) 28.573,6.089 28.573,5.077 X3.15
  Bottom Layer w0.3: X1.14 7.224,66.12 4.25,63.146 4.25,50.194 4.25,50.134 4.55,49.418 4.857,49.043 5.141,48.461 5.141,46.178 10.855,40.464 11.359,40.464 13.004,38.818 13.063,38.735 15.271,34.161 v1(15.326,33.052) ; v1(26.947,7.89) 26.947,7.933 38.478,19.464 X4.20
Display_DC: X3.27 X4.10 | length 36.1
  Top Layer w0.3: v1(30.349,20.334) 32.796,17.217 33.1,16.722 34.931,14.19 37.721,11.369 43.89,5.2 X3.27
  Bottom Layer w0.3: v1(30.349,20.334) 33.478,23.463 X4.10
Display_E: X1.6 X3.23 X4.12 | length 82.9
  Top Layer w0.3: X1.6 7.224,55.96 4.85,53.586 4.85,49.77 5.113,49.371 10.325,44.035 10.326,44.033 11.364,42.996 11.443,42.926 11.537,42.85 13.681,41.491 cw(c10.302,37.272) 13.756,41.431 13.757,41.429 13.947,41.271 14.297,40.922 14.461,40.752 17.03,37.629 17.064,37.579 17.247,37.316 17.386,37.115 17.516,36.922 25.953,23.529 ccw(c28.776,23.918) 27.003,21.687 27.067,21.623 cw(c25.794,20.35) 27.068,21.622 27.351,21.339 27.366,21.324 27.471,21.186 28.928,19.225 29.326,18.701 v1(29.502,18.525) 29.947,17.919 30.057,17.808 30.519,17.512 30.928,17.312 31.521,16.719 31.846,16.185 35.183,10.956 35.311,10.786 35.439,10.618 36.029,9.941 36.286,9.558 36.44,9.369 37.313,8.353 37.36,8.283 37.652,7.952 38.81,5.2 X3.23
  Bottom Layer w0.3: v1(29.502,18.525) 30.34,18.525 34.478,22.664 X4.12
Display_RS: X1.4 X3.25 X4.9 | length 77.4
  Top Layer w0.3: X1.4 7.3,53.42 6.05,52.17 6.05,50.131 11.526,44.53 11.93,44.126 14.444,42.471 15.497,41.419 15.988,40.871 cw(c-4.122,22.848) 17.314,39.272 19.048,37.009 19.078,36.979 21.4,32.661 ccw(c23.072,33.564) 21.479,32.528 27.128,23.842 ccw(c28.776,23.918) 27.797,22.59 27.825,22.562 27.828,22.559 27.851,22.536 ; 27.852,22.535 27.915,22.472 28.449,21.938 v1(29.572,20.418) 30.492,19.174 32.282,17.16 32.371,17.058 32.679,16.562 34.506,14.014 37.239,10.429 40.39,6.542 40.878,6.024 41.054,5.848 41.35,5.552 X3.25
  Bottom Layer w0.3: v1(29.572,20.418) 32.978,23.824 X4.9
Display_RW: X1.5 X3.24 X4.11 | length 90.8
  Top Layer w0.3: X1.5 9.84,55.96 8.59,57.21 6.782,57.21 4.338,54.766 4.25,53.835 4.25,49.59 4.646,48.99 9.725,43.786 9.726,43.785 10.953,42.558 11.217,42.326 11.324,42.25 13.325,41.005 13.354,40.984 cw(c10.302,37.272) 13.692,40.678 13.697,40.674 cw(c-4.122,22.848) 13.917,40.451 16.57,37.238 16.6,37.196 16.783,36.931 16.917,36.736 17.045,36.538 25.38,23.313 ccw(c28.776,23.918) 26.602,21.24 26.643,21.199 ; 26.643,21.198 26.859,20.982 26.873,20.968 26.971,20.84 v1(28.484,18.812) ; v1@28.514,18.833 v1(28.484,18.812) ; X3.24 38.81,2.66 37.608,3.862 37.461,6.158 37.46,6.183 37.125,7.578 37.108,7.648 37.062,7.702 35.994,8.966 35.686,9.345 35.422,9.7 35.084,10.092 34.985,10.223 34.808,10.442 34.728,10.558 34.723,10.565 31.096,16.543 30.752,16.887 29.552,17.46 29.516,17.497 29.246,17.767 v1(28.484,18.812)
  Bottom Layer w0.3: v1(28.484,18.812) 28.541,18.869 29.032,18.869 29.263,19.1 30.065,19.1 33.978,23.014 X4.11
Display_VO: X1.3 X3.26 X4.8 | length 84.9
  Top Layer w0.3: X1.3 9.84,53.42 8.59,54.67 6.782,54.67 5.538,53.426 5.45,53.338 5.45,49.95 5.58,49.752 10.926,44.282 11.682,43.526 11.767,43.45 13.499,42.356 cw(c10.302,37.272) 13.79,42.161 14.196,41.871 14.897,41.17 15.228,40.814 cw(c-4.122,22.848) 17.468,38.049 17.492,38.015 17.526,37.966 17.664,37.769 17.851,37.499 17.986,37.303 18.114,37.109 21.1,32.332 26.54,23.666 ccw(c28.776,23.918) 27.402,22.137 27.427,22.111 27.491,22.048 ; 27.491,22.047 27.848,21.69 27.863,21.676 27.966,21.541 28.704,20.538 v1(28.706,20.54) 28.718,20.524 28.995,20.183 31.946,16.895 32.276,16.354 35.778,11.165 35.807,11.126 36.625,10.194 36.886,9.772 37.781,8.734 37.907,8.584 38.252,8.201 39.758,6.015 cw(c38.81,5.2) 40.057,5.28 40.148,3.862 41.35,2.66 X3.26
  Bottom Layer w0.3: v1(28.706,20.54) 32.478,24.312 X4.8
GND: C1.2 C2.1 C3.1 C4.1 C5.1 C6.1 C7.1 R1.1 VT1.2 VT2.2 VT3.2 X1.1 X3.3 X3.4 X3.7 X3.8 X3.14 X3.29 X3.31 X3.34 X3.36 X3.37 X3.38 X4.1 X4.2 X4.3 X4.4 X4.24 | length 205.4
  Top Layer w0.3: VT1.2@4.101,21.261 5.059,20.303 5.059,16.02 9.558,11.522 9.558,1.782 10.303,1.037 12.187,1.037 13.41,2.26 X3.4
  Top Layer w1: v2(28.978,32.128) 32.837,35.987 C6.1@40.472,35.987 ; v2(40.372,37.641) 40.372,36.087 C6.1@40.472,35.987 ; C5.1 42.812,37.059 41.839,36.087 40.627,36.087 C6.1 C6.1@40.472,35.987
  Bottom Layer w0.3: X4.1 v2(28.978,32.128) v2@28.999,32.107 ; X4.2 29.478,32.586 v2@28.999,32.107 ; X4.3 29.978,32.36 29.703,32.086 v2@29.02,32.086 ; X4.4 30.478,32.11 29.918,31.55 29.556,31.55 v2@29.02,32.086 ; v2(40.372,37.641) 40.478,37.535 X4.24 ; R1.1 R1.1@44.562,41.252 ; C7.1@46.779,41.252 C7.1 ; X3.36 X3.36@54.05,2.66 ; v2@28.999,32.107 v2@29.02,32.086
  Bottom Layer w0.5: v2(40.372,37.641) 40.372,39.62 42.093,41.341 R1.1 ; R1.1@44.562,41.252 C7.1@46.779,41.252 ; VT3.2 45.775,9.388 45.775,8.413 46.43,7.758 49.064,10.392 VT2.2
  Bottom Layer w1: X1.1 10.141,50.779 10.141,48.227 C1.2 10.491,47.876 10.491,46.417 11.275,45.633 11.275,44.534 12.17,43.639 15.862,43.639 20.948,38.553 20.948,35.961 ; X3.3 X3.4 13.41,2.422 14.997,0.835 16.903,0.835 X3.8@18.49,2.422 ; X3.14 X3.14@26.11,2.422 ; v2@28.999,32.107 27.973,32.107 24.119,35.961 20.948,35.961 ; 46.43,7.758 X3.29 X3.31 48.97,4.8 X3.34@50.995,2.775 ; X3.37 X3.38 X3.36 X3.34 51.51,2.422 49.923,0.835 27.697,0.835 X3.14@26.11,2.422 ; X3.8@18.49,2.422 X3.8 X3.7 18.404,5.086 18.404,8.149 C3.1 18.319,8.484 17.25,9.553 17.25,10.659 C4.1 C2.1 20.948,30.12 20.948,35.961 ; X3.8@18.49,2.422 20.077,0.835 24.523,0.835 X3.14@26.11,2.422
Led_R: R4.2 X3.35 | length 66.4
  Top Layer w0.3: R4.2 3.868,16.39 9.133,11.126 9.133,1.575 10.156,0.551 51.795,0.551 52.796,1.553 52.796,3.533 54.05,4.787 X3.35
LEFT_BUTTON: K4.1 X3.12 | length 46.2
  Bottom Layer w0.3: X3.12 23.57,2.66 24.854,3.944 24.854,5.76 25.924,6.83 26.786,6.83 27.646,7.69 27.646,7.994 38.949,19.298 38.949,29.364 44.648,35.063 44.648,36.969 K4.1@46.384,38.704
MENU_BUTTON: K3.1 X3.11 | length 27.8
  Bottom Layer w0.3: X3.11 23.57,11.467 21.502,13.535 21.502,21.644 K3.1@28.776,28.918
NetC7_2: C7.2 X4.22 | length 14.4
  Bottom Layer w0.3: X4.22 39.478,40.465 41.491,42.477 45.673,42.477 46.008,42.812 46.519,42.812 C7.2
NetL1_1: L1.1 R3.2 | length 55.7
  Top Layer w0.3: R3.2 6.118,22.942 0.915,28.145 0.915,41.84 1.795,42.72 1.795,62.466 10.368,71.04 L1.1
NetL1_2: L1.2 VT1.3 | length 51.9
  Top Layer w0.3: VT1.3 3.135,25.253 0.487,27.902 0.487,42.017 1.367,42.897 1.367,62.639 8.368,69.641 L1.2
NetLS1_2: LS1.2 R6.1 VT3.3 | length 10.6
  Bottom Layer w0.3: LS1.2 42.733,13.222 ; VT3.3 42.733,13.074 42.733,13.222 ; R6.1 46.45,12.001 45.228,13.222 42.733,13.222
NetR1_2: R1.2 X4.21 | length 12.7
  Bottom Layer w0.3: X4.21 38.978,40.566 41.953,43.541 R1.2
NetR2_2: R2.2 VT2.1 | length 2.3
  Bottom Layer w0.3: R2.2 51.987,9.866 52.414,10.293 VT2.1
NetR4_1: R4.1 VT1.1 | length 3.1
  Top Layer w0.3: VT1.1 2.185,20.093 2.736,19.542 R4.1
NetR5_1: R5.1 X2.1 X2.2 X2.3 X2.4 | length 11.4
  Top Layer w0.5: X2.2 X2.1 X2.3 X2.4 R5.1
NetR7_2: R7.2 VT3.1 | length 5.2
  Bottom Layer w0.3: R7.2 42.357,8.177 42.357,8.832 44.884,11.359 44.884,11.684 45.131,11.93 VT3.1
NetVT2_3: VT2.3 X2.5 X2.6 X2.7 X2.8 | length 51.4
  Top Layer w0.5: X2.8 X2.7 X2.5 X2.6
  Bottom Layer w0.5: VT2.3 51.464,36.311 60.7,45.547 X2.7
RIGHT_BUTTON: K5.1 X3.13 | length 26.4
  Top Layer w0.3: v1(41.338,19.291) 41.345,19.297 46.501,19.297 K5.1@46.508,19.304
  Bottom Layer w0.3: X3.13 26.11,5.2 40.201,19.291 v1(41.338,19.291)
Speaker: R7.1 X3.30 | length 6.4
  Bottom Layer w0.3: R7.1 44.374,6.632 44.965,6.041 44.965,4.125 46.43,2.66 X3.30
START_BUTTON: K1.1 X3.9 | length 37.2
  Top Layer w0.3: K1.1@23.072,38.564 22.931,38.424 22.931,36.914 21.721,34.157 ccw(c23.072,33.564) 21.624,33.281 ccw(c23.072,33.564) 21.866,32.715 v1(25.858,27.047)
  Bottom Layer w0.3: X3.9 21.035,5.005 21.035,22.224 v1(25.858,27.047)
STOP_BUTTON: K2.1 X3.10 | length 21.1
  Top Layer w0.3: K2.1@10.477,19.146 19.676,9.947 19.676,4.014 21.03,2.66 X3.10
pads on no net: G1.G G2.G G3.G G4.G X4.M
copper on no net:
  other v1: 4.042,7.369 5.958,7.369 64.042,7.369 65.958,7.369 2.575,8.6 7.425,8.6 62.575,8.6 67.425,8.6 2.243,10.486 7.757,10.486 62.243,10.486 67.757,10.486 3.2,12.145 6.8,12.145 63.2,12.145 66.8,12.145 5,12.8 65,12.8 4.042,35.369 5.958,35.369 64.042,35.369 65.958,35.369 2.575,36.6 7.425,36.6 62.575,36.6 67.425,36.6 2.243,38.486 7.757,38.486 62.243,38.486 67.757,38.486 3.2,40.145 6.8,40.145 63.2,40.145 66.8,40.145 5,40.8 65,40.8

## Polygon pours and split planes (outlines as drawn)
no net on Top Solder (solid): 28.404,78.583 45.712,78.583 cw(c45.712,77.745) 46.55,77.745 46.55,74.054 cw(c45.712,74.054) 45.712,73.216 12.118,73.216 cw(c12.118,74.054) 11.28,74.054 11.28,77.745 cw(c12.118,77.745) 12.118,78.583 28.404,78.583
no net on Bottom Solder (solid): 28.404,78.583 45.712,78.583 cw(c45.712,77.745) 46.55,77.745 46.55,74.054 cw(c45.712,74.054) 45.712,73.216 12.118,73.216 cw(c12.118,74.054) 11.28,74.054 11.28,77.745 cw(c12.118,77.745) 12.118,78.583 28.404,78.583

## Other copper
Top Layer:
  text "Designed by: Bolshakov SP" at 11.892,76.347 h4
  text "Date: 25.09.2023  Rev: 1" at 11.892,73.714 h4
Bottom Layer:
  text "СТЖ-1.ПП.02.00.001-1" at 44.338,74.899 h4

## Silkscreen, mask and mechanical layers (free items; w line width, h text height)
Top Overlay:
  text "LCD Display BCB0802-02" at 3.838,41.595 h1.52 r90
Bottom Overlay:
  text "WINSTAR Display" at 38.271,42.498 h1.2
  text "WEO012864ALAP3N" at 38.309,40.156 h1.2
Board:
  the board outline again, w0.1
Наклейка:
  circle w0.1: c16.727,16.646 r7
  circle w0.1: c52.758,16.804 r7
  circle w0.1: c52.634,36.204 r7
  circle w0.1: c35.026,26.418 r7
  circle w0.1: c16.822,36.064 r7
  circle w0.1: c9.368,71.19 r2.248
  lines w0.1: 6,58.5 12.9,58.5 ; 12.9,45.5 57.1,45.5 57.1,71.5 12.9,71.5 12.9,45.5 ; 16.006,51.577 ccw(c16.7,51.576) 16.076,51.273 ccw(c16.712,51.582) 16.311,51 ccw(c16.706,51.572) 16.661,50.878 ccw(c16.706,51.578) 16.706,50.877 53.306,50.877 ccw(c53.307,51.57) 53.61,50.946 ccw(c53.3,51.583) 53.883,51.181 ccw(c53.311,51.576) 54.005,51.531 ccw(c53.304,51.577) 54.006,51.577 54.006,65.417 ccw(c53.313,65.417) 53.937,65.72 ccw(c53.3,65.411) 53.701,65.994 ccw(c53.307,65.421) 53.352,66.115 ccw(c53.306,65.415) 53.306,66.117 16.706,66.117 ccw(c16.706,65.423) 16.403,66.047 ccw(c16.712,65.411) 16.129,65.812 ccw(c16.701,65.417) 16.008,65.462 ccw(c16.708,65.417) 16.006,65.417 16.006,51.577
BoardCutOut:
  lines w0.1: 11.9,45 ccw(c12.4,45) 12.4,44.5 57.6,44.5 ccw(c57.6,45) 58.1,45 58.1,72 ccw(c57.6,72) 57.6,72.5 12.4,72.5 ccw(c12.4,72) 11.9,72 11.9,45